# EAGLE board logger (EAGLE 6.4)
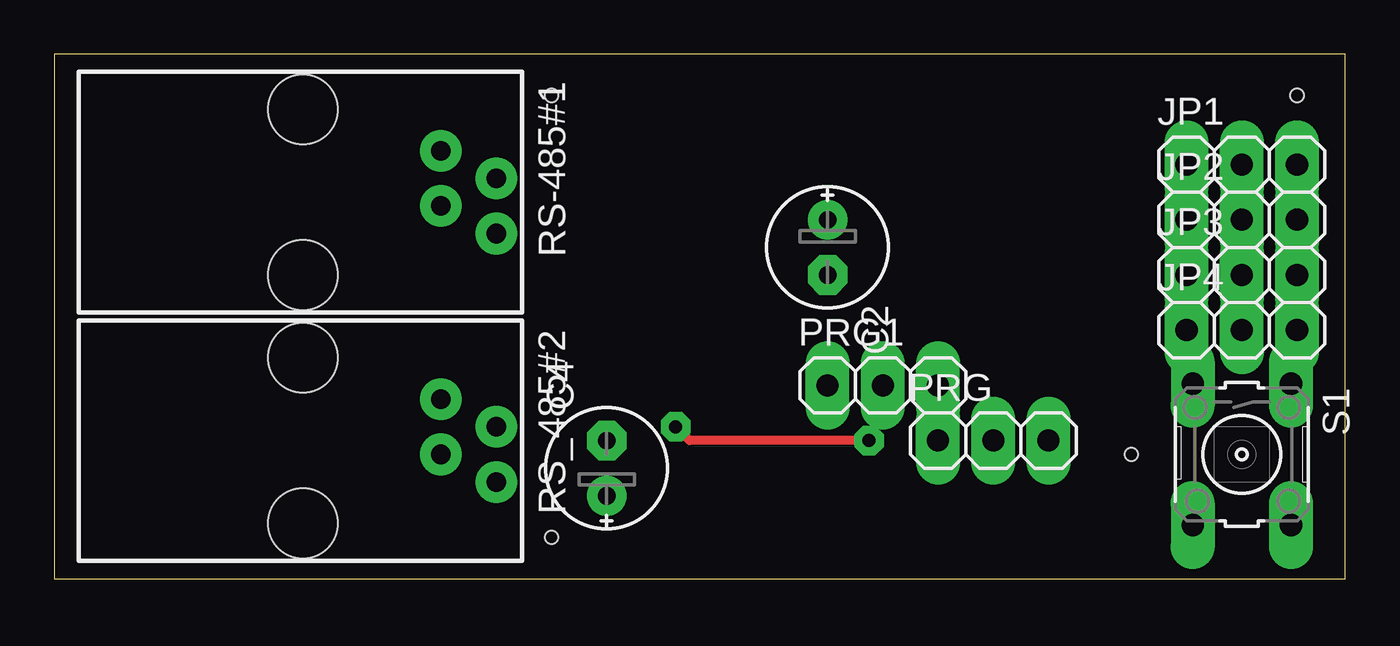
[diagram p0: board, top side]
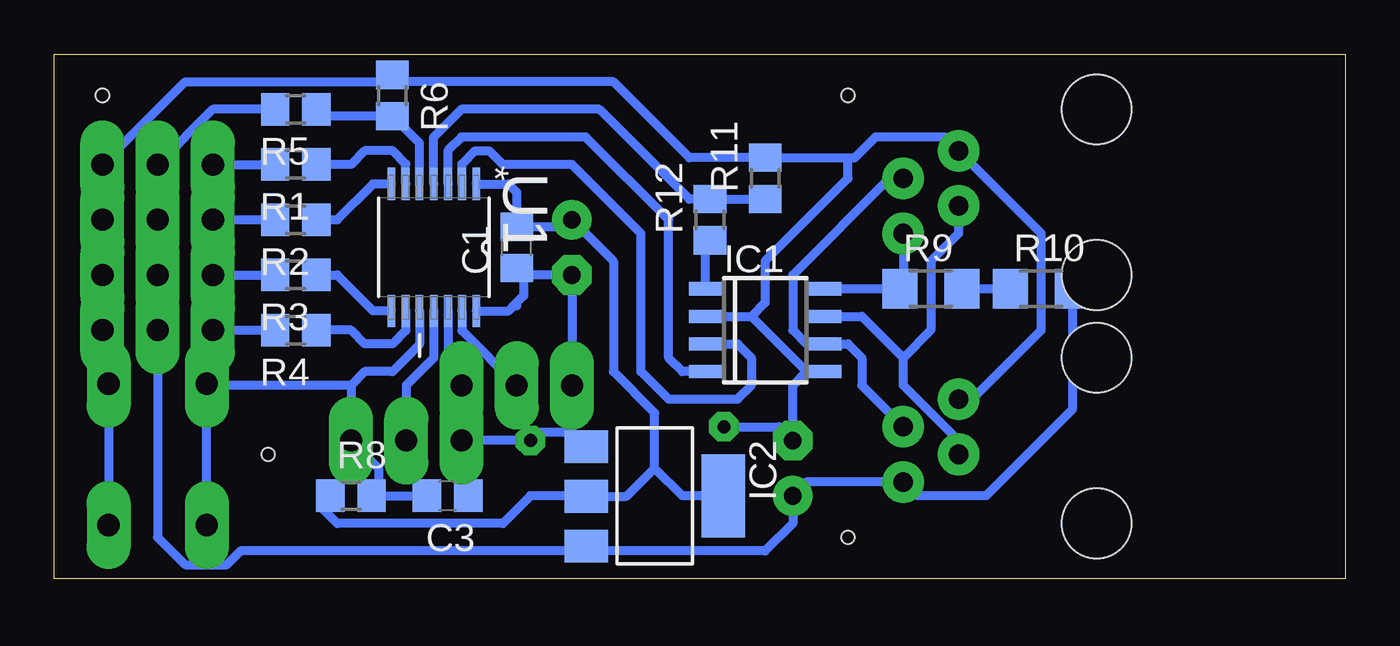
[diagram p1: board, bottom side, seen from below]

Size 59.36 x 24.12 mm. Coordinates in mm from the lower left corner, seen from the top.
Outline: 0,0 59.36,0 59.36,24.12 0,24.12 0,0
Copper layers (1*16): Top 0.035mm / dielectric 1.5mm / Bottom 0.035mm
Design rules "default *": minimum track width 10mil, minimum drill 24mil, track to track 8mil, track to pad 8mil, pad to pad 8mil, via to via 8mil, smd to smd 8mil, copper to edge 40mil, drill to drill 8mil, minimum pad ring 20mil, minimum via ring 15mil, stop-mask expansion 4mil, vias tented up to drill 0mil, thermal gap 10mil
Holes 0.6 mm at 57.15,22.22 49.53,5.71 22.86,1.91 22.86,22.22

## Footprints (pad centres in the part's own frame; a part is rotated, then mirrored left to right if it is on the bottom)
C0805 = smd 1.3 x 1.5: 1 -0.95,0; 2 0.95,0
E2,5-6E = drill 0.813 pad 1.575: + -1.27,0 | drill 0.813 pad 1.575 octagon: - 1.27,0
D_R-PDSO-G8 = smd 0.6 x 1.5: 1 -1.905,-2.75; 2 -0.635,-2.75; 3 0.635,-2.75; 4 1.905,-2.75; 5 1.905,2.75; 6 0.635,2.75; 7 -0.635,2.75; 8 -1.905,2.75
SOT223 = smd 1.499 x 2.007: 1 -2.261,-3.15; 2 0.025,-3.15; 3 2.311,-3.15 | smd 3.81 x 2.007: 4 0,3.15
1X03 = drill 1.016 long: 1 -2.54,0; 2 0,0; 3 2.54,0
R0805 = smd 1.3 x 1.5: 1 -0.95,0; 2 0.95,0
R1206 = smd 1.6 x 1.803: 1 -1.422,0; 2 1.422,0
14867 = drill 0.9 pad 1.422: 1 -1.905,6.35; 2 -0.635,8.89; 3 0.635,6.35; 4 1.905,8.89 | hole 3.2: -3.81,0; 3.81,0
B3F-10XX = drill 1.016 long: 1 -3.251,2.261; 2 3.251,2.261; 3 -3.251,-2.261; 4 3.251,-2.261
SOP65P640X120-14N = smd 1.473 x 0.356: 1 -2.921,1.956; 2 -2.921,1.295; 3 -2.921,0.66; 4 -2.921,0; 5 -2.921,-0.66; 6 -2.921,-1.295; 7 -2.921,-1.956; 8 2.921,-1.956; 9 2.921,-1.295; 10 2.921,-0.66; 11 2.921,0; 12 2.921,0.66; 13 2.921,1.295; 14 2.921,1.956

## Placement (x,y rotation side)
C1  [C0805]  38.1,15.24 90 bottom
C2  [E2,5-6E]  35.56,15.24 270 top
C3  [C0805]  41.27,3.81 180 bottom
C4  [E2,5-6E]  25.4,5.08 90 top
IC1  75176AD  [D_R-PDSO-G8]  26.67,11.43 270 bottom
IC2  REG1117  [SOT223]  31.75,3.81 270 bottom
JP1  [1X03]  54.61,19.05 0 top
JP2  [1X03]  54.61,16.51 0 top
JP3  [1X03]  54.61,13.97 0 top
JP4  [1X03]  54.61,11.43 0 top
PRG  [1X03]  43.18,6.35 0 top
PRG1  [1X03]  38.1,8.89 0 top
R1  [R0805]  48.26,19.05 180 bottom
R2  [R0805]  48.26,16.51 180 bottom
R3  [R0805]  48.26,13.97 180 bottom
R4  [R0805]  48.26,11.43 180 bottom
R5  [R0805]  48.26,21.59 180 bottom
R6  [R0805]  43.81,22.22 270 bottom
R8  [R0805]  45.72,3.81 0 bottom
R9  [R1206]  19.05,13.34 0 bottom
R10  [R1206]  13.97,13.34 0 bottom
R11  [R0805]  26.67,18.41 90 bottom
R12  [R0805]  29.21,16.51 90 bottom
RS-485#1  14867  [14867]  11.43,17.78 270 top
RS_485#2  14867  [14867]  11.43,6.35 270 top
S1  [B3F-10XX]  54.61,5.71 270 top
U1  MSP430G2352IPW14  [SOP65P640X120-14N]  41.91,15.24 270 bottom

## Library data of the parts
C1-C4 R1-R6 R8-R12 = rcl
IC1 = 751xx
IC2 = burr-brown; MPN: REG1117; OC_FARNELL: 1097566; OC_NEWARK: 14P6981
JP1-JP4 PRG PRG1 = pinhead
RS-485#1 RS_485#2 = con-4ucon; OC_FARNELL: unknown; OC_NEWARK: unknown
S1 = switch-omron; MPN: B3F-1000; OC_FARNELL: 176432; OC_NEWARK: 36M3542
U1 = MSP430G2352IPW14; MPN: MSP430G2352IPW14; OC_FARNELL: 1866895; OC_NEWARK: 24T4701; PACKAGE: TSSOP-14; SUPPLIER: Texas Instruments

## Nets
+3V3: C1.2 C2.+ IC2.2 IC2.4 R8.1 U1.1
+5V: C4.+ IC2.3 JP1.2 JP2.2 JP3.2 JP4.2 R5.2 R10.2 RS_485#2.4
GND: C1.1 C2.- C3.1 C4.- IC1.2 IC1.5 IC2.1 JP1.3 JP2.3 JP3.3 JP4.3 PRG1.1 PRG.1 R6.1 R11.2 RS-485#1.1 RS_485#2.1 S1.1 S1.2 U1.14
N$1: IC1.6 RS-485#1.2 RS_485#2.2
N$2: IC1.7 RS-485#1.3 RS_485#2.3
N$3: R5.1 R6.2 U1.5
N$4: R4.1 U1.9
N$5: JP4.1 R4.2
N$6: JP3.1 R3.2
N$7: JP2.1 R2.2
N$8: JP1.1 R1.2
N$9: R3.1 U1.8
N$10: R2.1 U1.7
N$11: R1.1 U1.6
N$12: PRG1.2 U1.13
N$13: IC1.4 U1.3
N$14: IC1.3 U1.2
N$15: C3.2 PRG.3 R8.2 S1.3 S1.4 U1.10
N$16: PRG.2 U1.11
N$18: PRG1.3 U1.12
N$19: R9.2 R10.1
N$20: IC1.8 R9.1 RS-485#1.4
N$21: IC1.1 R12.1
N$22: R11.1 R12.2 U1.4

## Tracks (layer width: path | path; a pad name or v marks a point on that pad's centre or on a via)
+3V3
  Bottom 0.406: U1.1 38.48,18.16 38.1,17.78 C1.2 35.88,16.19 C2.+ 33.66,14.61 33.66,9.52 31.75,7.62 31.75,5.08 | 31.75,5.08 33.05,3.78 IC2.2 34.92,3.81 37.47,3.81 38.73,2.54 46.36,2.54 46.99,3.17 46.99,3.49 R8.1 | IC2.4 30.48,3.81 31.75,5.08
+5V
  Bottom 0.406: JP1.2 JP2.2 JP3.2 JP4.2 | R10.2 12.55,7.77 16.51,3.81 19.68,3.81 RS_485#2.4 24.77,4.45 C4.+ 25.4,2.54 26.67,1.27 34.67,1.27 IC2.3 35.13,1.27 50.8,1.27 51.44,0.63 53.34,0.63 54.61,1.91 JP4.2 | JP1.2 JP4.2 | R5.2 52.07,21.59 JP1.2
GND  (via drill 0.6 pad 0.61)
  Top 0.406: v37.47,6.35 29.21,6.35 v28.57,6.98
  Bottom 0.406: U1.14 38.48,12.32 38.1,12.7 | RS_485#2.1 17.14,8.25 13.97,11.43 13.97,15.88 RS-485#1.1 18.41,20.32 21.59,20.32 22.55,19.36 22.86,19.36 | IC1.2 27.3,12.06 | 27.3,12.06 26.67,12.7 26.67,14.61 22.86,18.41 22.86,19.36 | IC1.5 24.77,9.52 | 24.77,9.52 27.3,12.06 | 38.1,12.7 38.1,12.55 | 37.78,13.97 C2.- PRG1.1 35.56,6.73 | 37.78,13.97 C1.1 | 37.78,13.97 37.78,13.02 38.1,12.7 | 24.77,9.52 25.4,8.89 C4.- 26.03,6.98 v28.57,6.98 | 22.86,19.36 R11.2 30.16,19.36 33.66,22.86 43.5,22.86 R6.1 44.13,22.86 53.34,22.86 JP1.3 JP2.3 JP3.3 JP4.3 57.15,9.25 S1.1 S1.2 | 35.56,6.73 IC2.1 | 35.56,6.73 37.08,6.73 v37.47,6.35 PRG.1 40.64,4.12 C3.1
N$1
  Bottom 0.406: RS_485#2.2 22.23,8.89 22.23,10.16 22.86,10.8 IC1.6 24.77,10.8 25.4,11.43 25.4,13.97 20.95,18.41 RS-485#1.2
N$2
  Bottom 0.406: RS-485#1.3 17.78,15.88 19.05,14.61 19.05,11.43 20.32,10.16 | RS_485#2.3 17.78,6.35 20.32,8.89 20.32,10.16 | IC1.7 22.23,12.06 20.32,10.16
N$3
  Bottom 0.406: U1.5 42.57,20.03 R6.2 47,21.28 R5.1
N$4
  Bottom 0.406: U1.9 43.2,11.41 43.81,10.8 45.08,10.8 45.72,11.43 R4.1
N$5
  Bottom 0.406: JP4.1 R4.2
N$6
  Bottom 0.406: JP3.1 R3.2
N$7
  Bottom 0.406: JP2.1 R2.2
N$8
  Bottom 0.406: JP1.1 R1.2
N$9
  Bottom 0.406: U1.8 44.7,12.32 46.36,13.97 R3.1
N$10
  Bottom 0.406: U1.7 44.7,18.16 46.36,16.51 R2.1
N$11
  Bottom 0.406: U1.6 43.2,19.08 43.81,19.69 45.08,19.69 45.72,19.05 R1.1
N$12
  Bottom 0.406: U1.13 40.61,11.41 PRG1.2
N$13
  Bottom 0.406: U1.3 41.25,19.71 40.64,20.32 34.92,20.32 31.11,16.51 31.11,10.16 30.48,9.52 IC1.4
N$14
  Bottom 0.406: U1.2 40.61,19.08 40,19.69 39.37,19.69 38.73,19.05 35.56,19.05 32.38,15.88 32.38,9.52 31.11,8.25 27.94,8.25 27.3,8.89 27.3,10.16 27.94,10.8 IC1.3
N$15
  Bottom 0.406: U1.10 42.57,10.77 43.81,9.52 45.08,9.52 45.72,8.89 | 45.72,8.89 PRG.3 44.45,5.08 44.45,4.13 R8.2 C3.2 | S1.4 S1.3 52.27,8.89 45.72,8.89
N$16
  Bottom 0.406: U1.11 41.91,10.16 43.18,8.89 PRG.2
N$18
  Bottom 0.406: U1.12 41.25,9.5 PRG1.3
N$19
  Bottom 0.406: R9.2 R10.1
N$20
  Bottom 0.406: RS-485#1.4 20.32,13.49 R9.1 IC1.8
N$21
  Bottom 0.406: IC1.1 29.42,15.35 R12.1
N$22
  Bottom 0.406: U1.4 41.91,20.32 40.64,21.59 34.29,21.59 30.16,17.46 R12.2 R11.1